# Altium PCB Copy of PicoROM.PcbDoc
Units mm, origin at the board's own origin, x right, y up, seen from the top; angles counter-clockwise.
Board outline 42.2 x 17.8 mm, 4 copper layers (F.Cu, In1.Cu, In4.Cu, B.Cu), stack 0.97 mm thick; 70 components, 124 nets, 450 pads, 11 vias.
Unrouted connection lines stored in the file: 77.
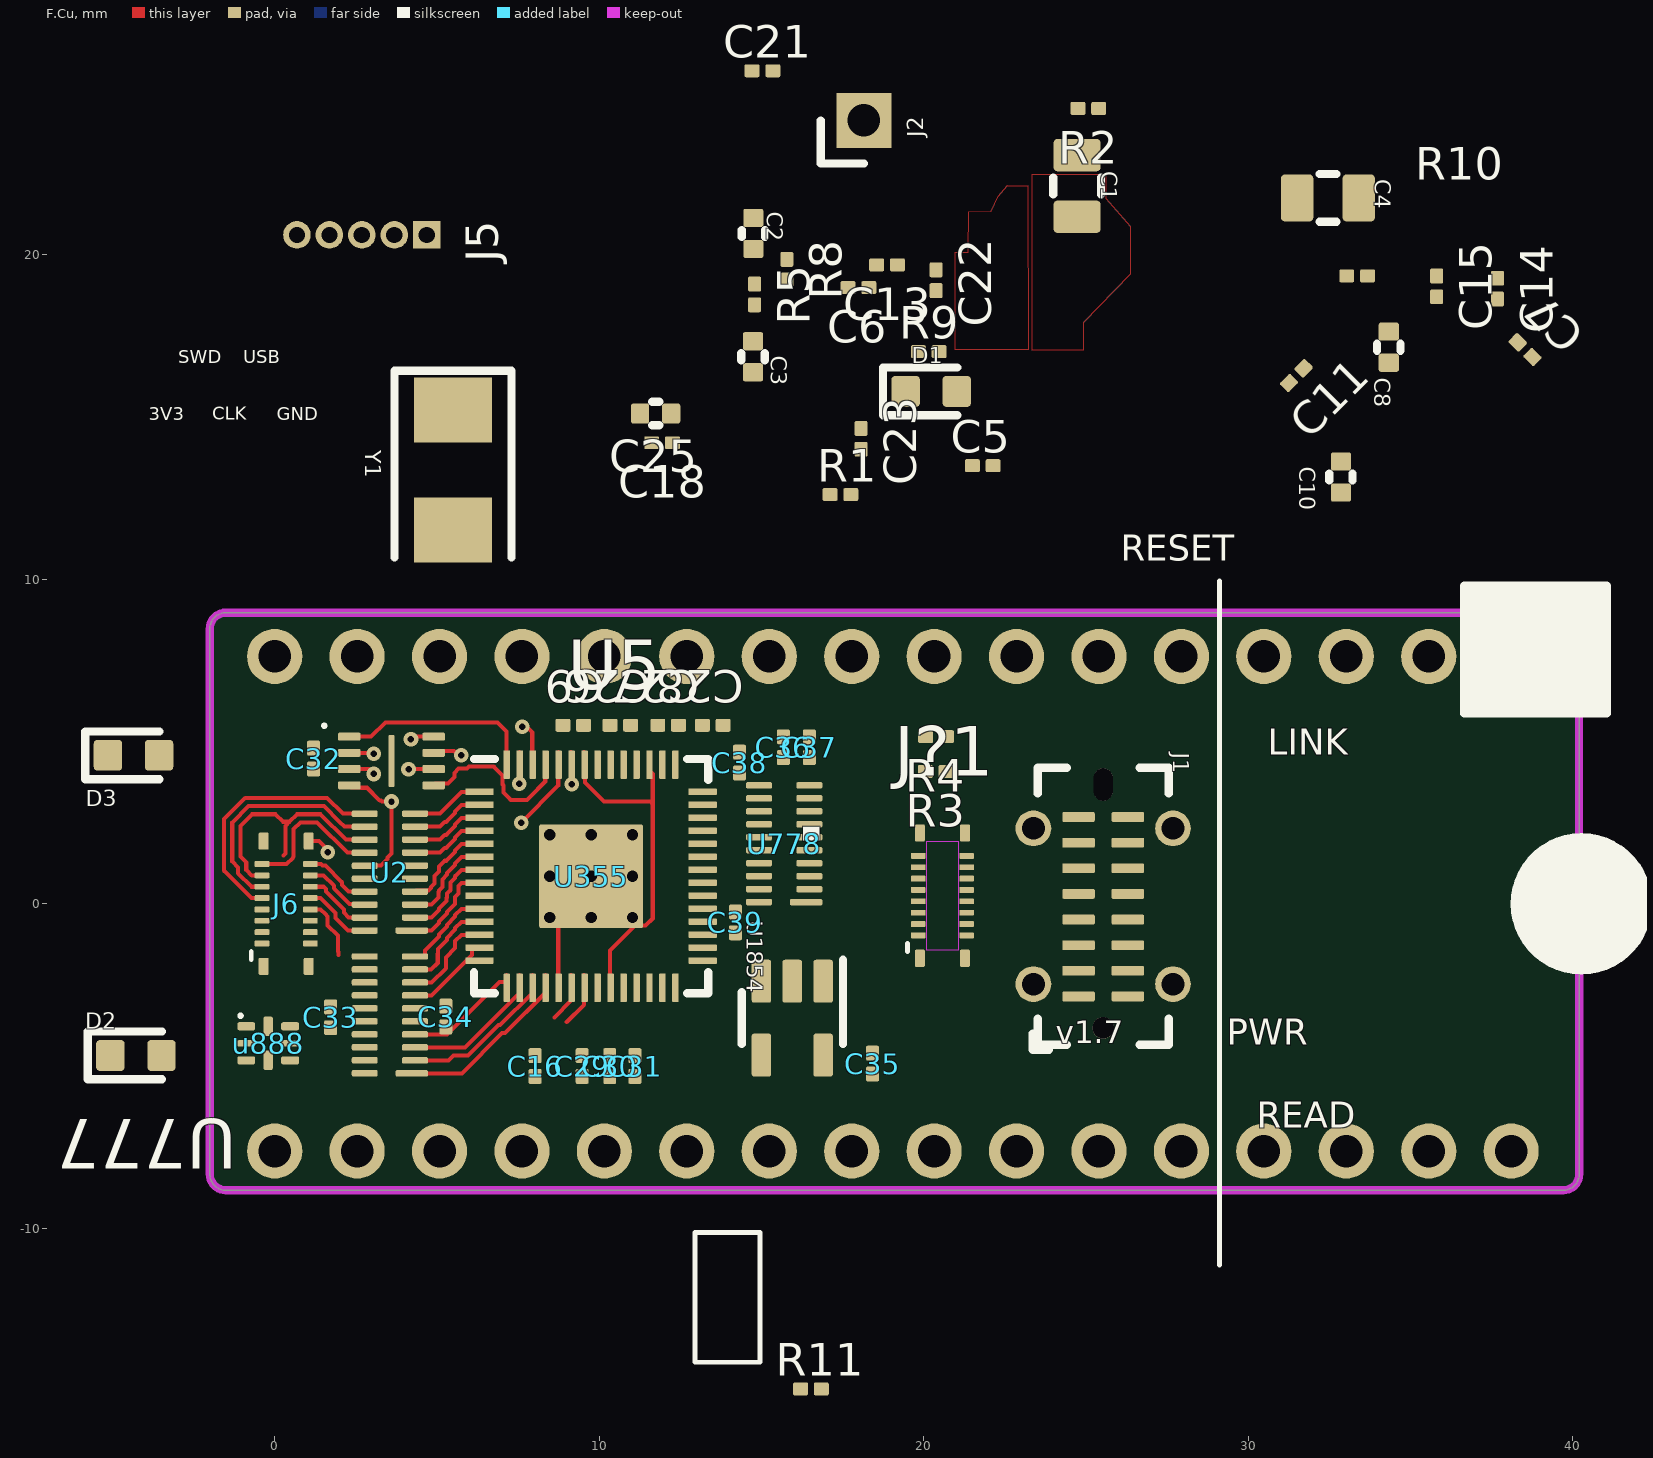
[diagram p0: F.Cu view]
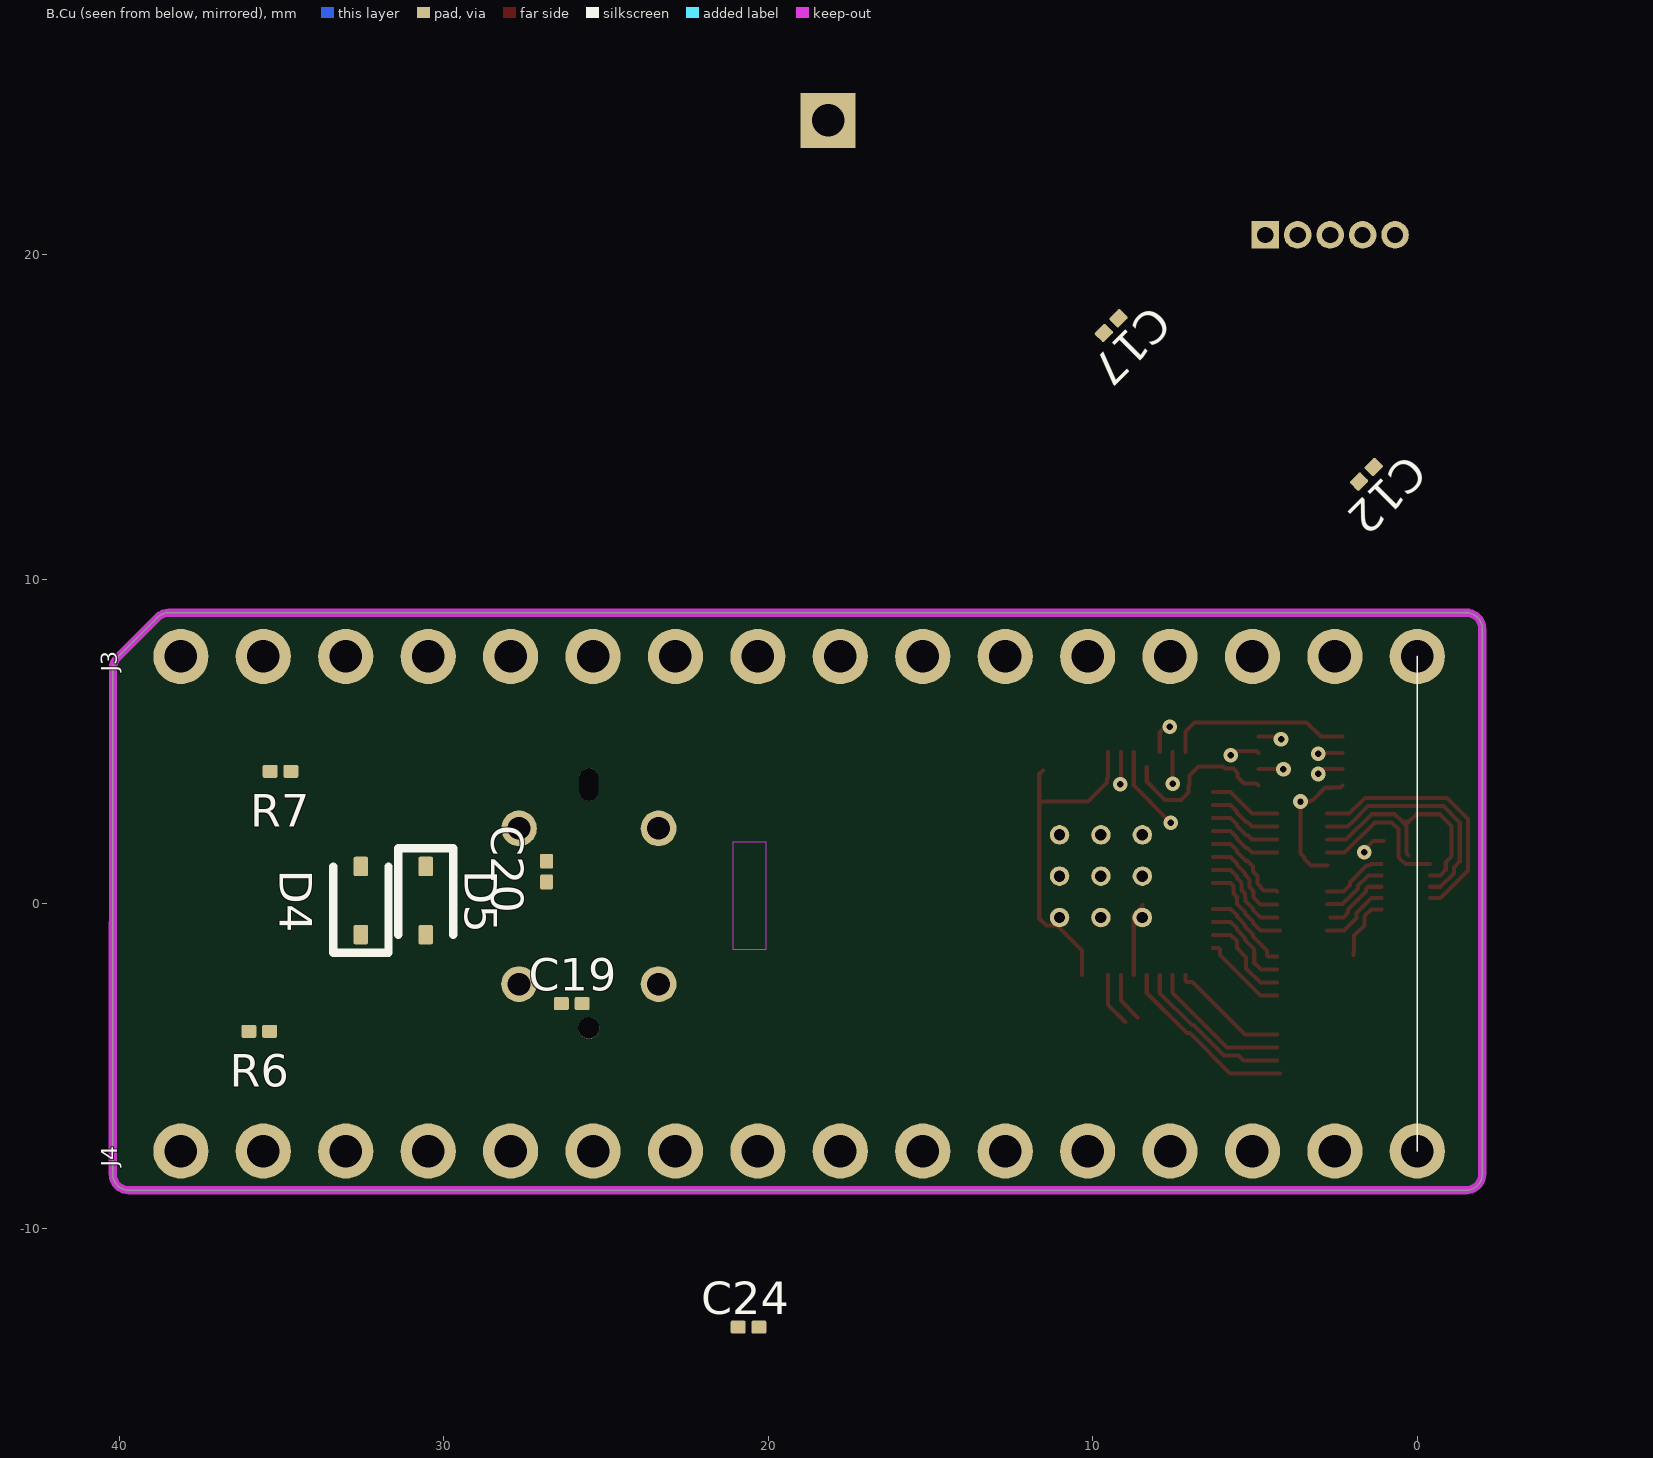
[diagram p1: B.Cu view, seen from below]
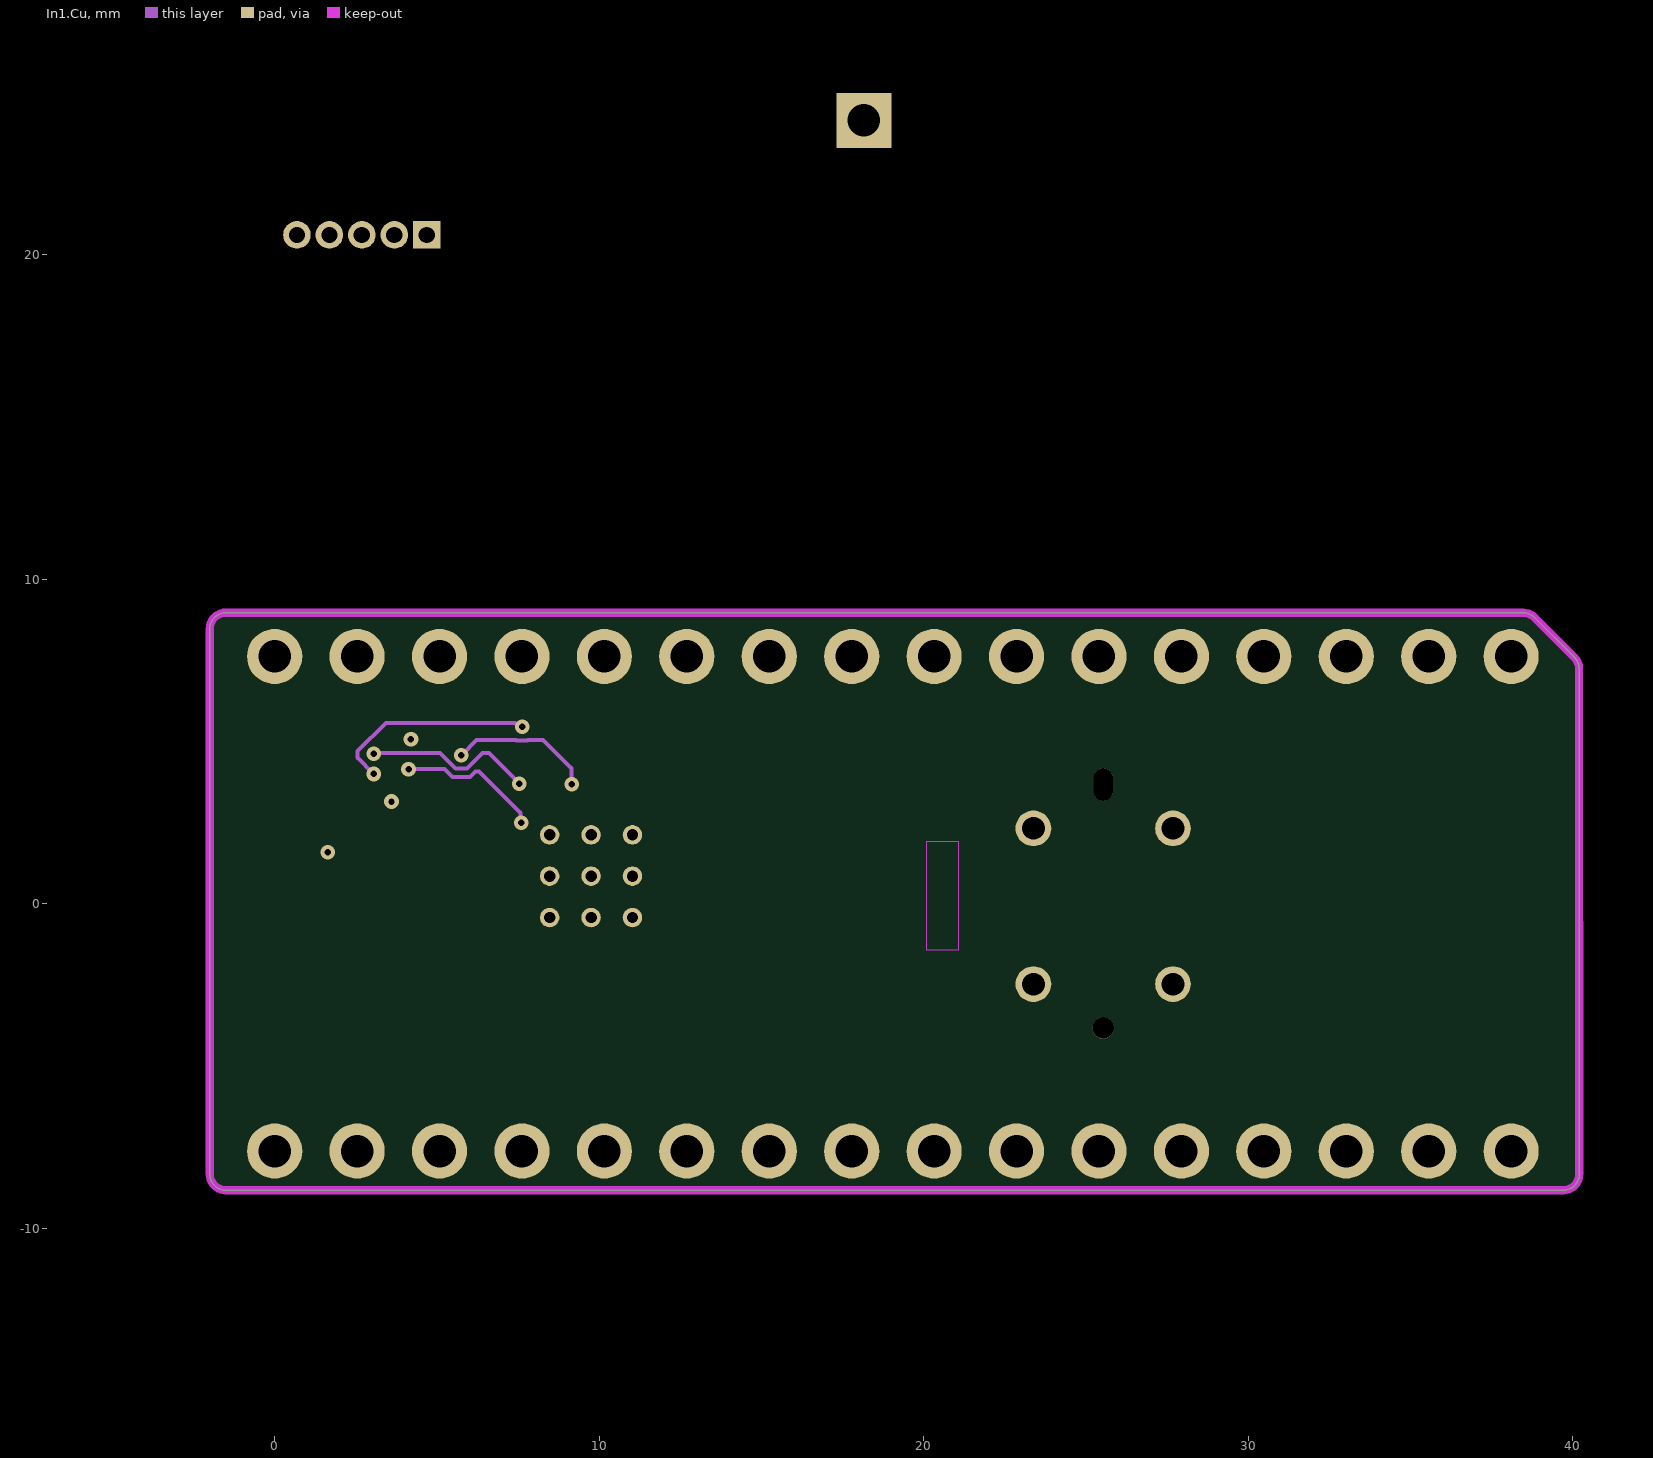
[diagram p2: In1.Cu]

## Layer stack, top to bottom
F.Mask: solder mask 0.0102, Solder Resist, Dk 3.5
F.Cu: signal copper 0.035
Dielectric 1: dielectric 0.16, FR-4, Dk 4.8
In1.Cu: signal copper 0.035
Dielectric3: dielectric 0.51, FR-4, Dk 4.8
In4.Cu: signal copper 0.035
Dielectric5: dielectric 0.16, FR-4, Dk 4.8
B.Cu: signal copper 0.035
B.Mask: solder mask 0.0102, Solder Resist, Dk 3.5

## Board outline
-1.5,8.97 38.468,8.969 cw(c38.468,8.469) 38.821,8.822 40.049,7.595 cw(c39.695,7.242) 40.2,-8.33 cw(c39.7,-8.33) 39.7,-8.83 -1.5,-8.83 cw(c-1.5,-8.33) -2,-8.33 -2,8.47 cw(c-1.5,8.47) -1.5,8.97

## Design rules (kind name [scope] priority, off if disabled: settings)
Clearance [All] p1: gap=0.125 ignorepadtopadclearanceinfootprint=FALSE
MinimumSolderMaskSliver [All] p1: minsoldermaskwidth=0
PolygonConnect Polygon_In2.Cu-+3V3_ConnectDirect [IsNamedPolygon('In2.Cu-+3V3') vs IsVia] p1: connectstyle=Direct reliefconductorwidth=0.254 reliefentries=4 polygonreliefangle="90 Angle" airgapwidth=0.254
PolygonConnect Polygon_In2.Cu-+3V3_ConnectRelief45 [IsNamedPolygon('In2.Cu-+3V3') vs (IsThruPin or IsSMTPin) and (PadShape_AllLayers = 'Round')] p2: connectstyle=Relief reliefconductorwidth=0.5 reliefentries=4 polygonreliefangle="45 Angle" airgapwidth=0.5
PolygonConnect Polygon_In2.Cu-+3V3_ConnectRelief90 [IsNamedPolygon('In2.Cu-+3V3') vs (IsThruPin or IsSMTPin) and (PadShape_AllLayers <> 'Round')] p3: connectstyle=Relief reliefconductorwidth=0.5 reliefentries=4 polygonreliefangle="90 Angle" airgapwidth=0.5
PolygonConnect Polygon_In4.Cu-GND_ConnectDirect [IsNamedPolygon('In4.Cu-GND') vs IsVia] p4: connectstyle=Direct reliefconductorwidth=0.254 reliefentries=4 polygonreliefangle="90 Angle" airgapwidth=0.254
PolygonConnect Polygon_In4.Cu-GND_ConnectRelief45 [IsNamedPolygon('In4.Cu-GND') vs (IsThruPin or IsSMTPin) and (PadShape_AllLayers = 'Round')] p5: connectstyle=Relief reliefconductorwidth=0.508 reliefentries=4 polygonreliefangle="45 Angle" airgapwidth=0.508
PolygonConnect Polygon_In4.Cu-GND_ConnectRelief90 [IsNamedPolygon('In4.Cu-GND') vs (IsThruPin or IsSMTPin) and (PadShape_AllLayers <> 'Round')] p6: connectstyle=Relief reliefconductorwidth=0.508 reliefentries=4 polygonreliefangle="90 Angle" airgapwidth=0.508
PolygonConnect Polygon_In1.Cu-GND_ConnectDirect [IsNamedPolygon('In1.Cu-GND') vs IsVia] p7: connectstyle=Direct reliefconductorwidth=0.254 reliefentries=4 polygonreliefangle="90 Angle" airgapwidth=0.254
PolygonConnect Polygon_In1.Cu-GND_ConnectRelief45 [IsNamedPolygon('In1.Cu-GND') vs (IsThruPin or IsSMTPin) and (PadShape_AllLayers = 'Round')] p8: connectstyle=Relief reliefconductorwidth=0.508 reliefentries=4 polygonreliefangle="45 Angle" airgapwidth=0.508
PolygonConnect Polygon_In1.Cu-GND_ConnectRelief90 [IsNamedPolygon('In1.Cu-GND') vs (IsThruPin or IsSMTPin) and (PadShape_AllLayers <> 'Round')] p9: connectstyle=Relief reliefconductorwidth=0.508 reliefentries=4 polygonreliefangle="90 Angle" airgapwidth=0.508
PolygonConnect Polygon_F.Cu-+3V3_ConnectDirect [IsNamedPolygon('F.Cu-+3V3')] p10: connectstyle=Direct reliefconductorwidth=0.254 reliefentries=4 polygonreliefangle="90 Angle" airgapwidth=0.254
PolygonConnect Polygon_F.Cu-GND_ConnectDirect [IsNamedPolygon('F.Cu-GND')] p11: connectstyle=Direct reliefconductorwidth=0.254 reliefentries=4 polygonreliefangle="90 Angle" airgapwidth=0.254
RoutingVias [All] p1: holewidth=0.25 width=0.45 viastyle="Through Hole" minholewidth=0.2 minwidth=0.45 maxholewidth=0.4 maxwidth=0.8
SilkToSilkClearance [All] p1: silktosilkclearance=0
SilkToSolderMaskClearance [IsPad] p1: minsilkscreentomaskgap=0 clearancetoexposedcopper=TRUE
SolderMaskExpansion [All] p1: expansion=0.102 istentingtop=FALSE
SupplyNets "Schematic Supply Nets_3" [InNet('P1V1')] p1: voltage=0.000
SupplyNets "Schematic Supply Nets_2" [InNet('GND')] p2: voltage=0.000
SupplyNets "Schematic Supply Nets_1" [InNet('P3V3')] p3: voltage=0.000
SupplyNets "Schematic Supply Nets" [InNet('P5V')] p4: voltage=0.000
Width [All] p1: maxlimit=5 minlimit=0.125 preferedwidth=0.125
27 further rules are at their usual default settings.

## Components (designator, comment, footprint, x,y, rotation, side; value= is the part's Value field where it differs from the comment)
C1 "1u" C_0805_2012Metric 24.726,22.119 r270 top
C2 "27p" C_0402_1005Metric 14.749,20.656 r90 top
C3 "27p" C_0402_1005Metric 14.739,16.856 r270 top
C4 "1u" C_0805_2012Metric 32.455,21.749 r0 top
C5 "Comment" C_0201_0603Metric#1 21.818,13.498 r0 top value=100n
C6 "100n" C_0201_0603Metric#1 17.989,18.986 r180 top
C7 "100n" C_0201_0603Metric#1 38.53,17.074 r315 top
C8 "1u" C_0402_1005Metric 34.33,17.149 r270 top
C9 "100n" C_0201_0603Metric#1 9.2,5.5 r0 top
C10 "1u" C_0402_1005Metric 32.855,13.149 r270 top
C11 "100n" C_0201_0603Metric#1 31.48,16.274 r225 top
C12 "100n" C_0201_0603Metric#2 1.569,13.234 r135 bottom
C13 "100n" C_0201_0603Metric#1 18.869,19.686 r180 top
C14 "100n" C_0201_0603Metric#1 37.68,18.954 r270 top
C15 "100n" C_0201_0603Metric#1 35.805,19.024 r270 top
C16 "100n" C_0201_0603Metric#3 8.025,-5 r270 top
C17 "100n" C_0201_0603Metric#2 9.433,17.816 r135 bottom
C18 "100n" C_0201_0603Metric#1 11.939,14.206 r180 top
C19 "Comment" C_0201_0603Metric#2 26.055,-3.076 r0 bottom value=100n
C20 "Comment" C_0201_0603Metric#2 26.832,0.991 r270 bottom value=100n
C21 "Comment" C_0201_0603Metric#1 15.031,25.668 r0 top value=100n
C22 "Comment" C_0201_0603Metric#1 20.381,19.213 r270 top value=100n
C23 "100n" C_0201_0603Metric#1 18.069,14.326 r270 top
C24 "Comment" C_0201_0603Metric#2 20.609,-13.045 r0 bottom value=100n
C25 "1u" C_0402_1005Metric 11.739,15.106 r180 top
C26 "100n" C_0201_0603Metric#1 10.65,5.5 r0 top
C27 "100n" C_0201_0603Metric#1 12.125,5.5 r0 top
C28 "100n" C_0201_0603Metric#1 13.5,5.5 r0 top
C29 "100n" C_0201_0603Metric#3 9.475,-5 r270 top
C30 "100n" C_0201_0603Metric#3 10.325,-5 r270 top
C31 "100n" C_0201_0603Metric#3 11.1,-5 r270 top
C32 "100n" C_0201_0603Metric#3 1.2,4.475 r270 top
C33 "100n" C_0201_0603Metric#3 1.725,-3.5 r270 top
C34 "100n" C_0201_0603Metric#3 5.275,-3.475 r270 top
C35 "100n" C_0201_0603Metric#3 18.425,-4.925 r270 top
C36 "100n" C_0201_0603Metric#3 15.675,4.825 r270 top
C37 "100n" C_0201_0603Metric#3 16.475,4.825 r270 top
C38 "100n" C_0201_0603Metric#3 14.325,4.35 r270 top
C39 "100n" C_0201_0603Metric#3 14.2,-0.575 r270 top
D1 "LED" LED_0603_1608Metric 20.231,15.788 r0 top
D2 "LED" LED_0603_1608Metric -4.275,-4.675 r0 top
D3 "LED" LED_0603_1608Metric -4.35,4.575 r0 top
D4 "NSR0320MW2T1G" D_SOD-323 32.555,0.099 r270 bottom
D5 "NSR0320MW2T1G" D_SOD-323 30.555,0.099 r90 bottom
J1 "USB_C_Receptacle_USB2.0" USB_C_Receptacle_G-Switch_GT-USB-7051x 25.53,-0.076 r90 top
J2 "External Reset" PinHeader_1x01_P2.54mm_Vertical 18.156,24.138 r90 top
J3 "Conn_01x16" PinHeader_1x16_P2.54mm_Vertical 38.1,7.62 r270 bottom
J4 "Conn_01x16" PinHeader_1x16_P2.54mm_Vertical 38.1,-7.62 r270 bottom
J5 "Conn_01x05_Pin" PinHeader_1x05_P1.00mm_Vertical 4.686,20.61 r270 top
J6 "CONN-HIROSE-BM28B0.6-16DS-2-0.35V" CONN-HIROSE-BM28B0.6-16DS-2-0.35V#1 0.355,0 r90 top
J?1 "CONN-HIROSE-BM28B0.6-16DS-2-0.35V" CONN-HIROSE-BM28B0.6-16DS-2-0.35V#2 20.575,0.25 r90 top
R1 "1k" R_0201_0603Metric#1 17.434,12.609 r0 top
R2 "1k" R_0201_0603Metric#1 25.071,24.508 r180 top
R3 "27" R_0201_0603Metric#1 20.37,4.075 r180 top
R4 "27" R_0201_0603Metric#1 20.38,5.15 r180 top
R5 "1k" R_0201_0603Metric#1 14.789,18.776 r270 top
R6 "5.1k" R_0201_0603Metric#2 35.685,-3.931 r180 bottom
R7 "5.1k" R_0201_0603Metric#2 35.03,4.08 r180 bottom
R8 "1k" R_0201_0603Metric#1 15.781,19.538 r270 top
R9 "1k" R_0201_0603Metric#1 20.156,17.013 r0 top
R10 "1k" R_0201_0603Metric#1 33.355,19.349 r180 top
R11 "100k" R_0201_0603Metric#1 16.525,-14.95 r0 top
U2 "IC-TI-TXB0108-DQS" SON40P200X55-20N 3.55,0.975 r180 top
U5 "IC-WINBOND-W25Q128JVS" SON50P300X60_HS-9N 3.6,4.4 r0 top
U355 "RP2040" RP2040-QFN-56 9.75,0.85 r0 top
U777 "IC-TI-TXB0108-DQS" SON40P200X55-20N 3.55,-3.425 r180 top
U778 "IC-TI-TXB0108-DQS" SON40P200X55-20N 15.7,1.85 r180 top (schematic designator U777)
u888 "Comment" PQFN50P150X150X40-8N -0.2,-4.3 r0 top
U1854 "AP2112K-3.3" SOT-23-5 15.95,-3.525 r270 top
Y1 "445C25D12M00000" Crystal_SMD_5032-2Pin_5.0x3.2mm 5.496,13.371 r270 top

## Footprints (in the part's own frame and the unit in brackets; to place one, negate y for a bottom-side part, rotate by r counter-clockwise, add the part's x,y. Pads: shape width x height; smd on the part's side, far side on the other; paste and mask are expansions set on the pad)
C_0201_0603Metric#1 [mm]
  rrect25% 0.46x0.4 smd paste-0.46 mask+0.051: 1(-0.32,0) 2(0.32,0)
  rrect25% 0.318x0.36 on Top Paste mask-0.36: Un1(-0.345,0) Un2(0.345,0)
C_0201_0603Metric#2 [mm]
  rrect25% 0.46x0.4 smd paste-0.46 mask+0.051: 1(0.32,0) 2(-0.32,0)
  rrect25% 0.318x0.36 on Bottom Paste mask-0.36: Un1(0.345,0) Un2(-0.345,0)
C_0201_0603Metric#3 [mm]
  rrect25% 0.46x0.4 smd paste-0.46 mask+0.051: 1(0.32,0) 2(-0.32,0)
  rrect25% 0.318x0.36 on Top Paste mask-0.36: Un1(0.345,0) Un2(-0.345,0)
C_0402_1005Metric [mm]
  rrect25% 0.56x0.62 smd mask+0.051: 1(-0.48,0) 2(0.48,0)
  silkscreen extent -0.11,-0.36 0.11,0.36
C_0805_2012Metric [mm]
  rrect25% 1x1.45 smd mask+0.051: 1(-0.95,0) 2(0.95,0)
  silkscreen extent -0.26,-0.73 0.26,0.73
CONN-HIROSE-BM28B0.6-16DS-2-0.35V#1 [mm]
  rrect30% 0.18x0.45 smd mask+0.05: 1(-1.225,0.745) 2(-1.225,-0.745) 3(-0.875,0.745) 4(-0.875,-0.745) 5(-0.525,0.745) 6(-0.525,-0.745) 7(-0.175,0.745) 8(-0.175,-0.745) 9(0.175,0.745) 10(0.175,-0.745) 11(0.525,0.745) 12(0.525,-0.745) 13(0.875,0.745) 14(0.875,-0.745) 15(1.225,0.745) 16(1.225,-0.745)
  rrect30% 0.53x0.31 smd mask+0.05: 17(-1.93,0.694) 18(-1.93,-0.694) 19(1.93,0.694) 20(1.93,-0.694)
  silkscreen extent -1.73,1.07 -1.48,1.07, body extent -2.7,-0.85 2.7,0.85, height 0.65
CONN-HIROSE-BM28B0.6-16DS-2-0.35V#2 [mm]
  rrect30% 0.18x0.45 smd mask+0.05: 1(-1.225,0.745) 2(-1.225,-0.745) 3(-0.875,0.745) 4(-0.875,-0.745) 5(-0.525,0.745) 6(-0.525,-0.745) 7(-0.175,0.745) 8(-0.175,-0.745) 9(0.175,0.745) 10(0.175,-0.745) 11(0.525,0.745) 12(0.525,-0.745) 13(0.875,0.745) 14(0.875,-0.745) 15(1.225,0.745) 16(1.225,-0.745)
  rrect30% 0.53x0.31 smd mask+0.05: 17(-1.93,0.694) 18(-1.93,-0.694) 19(1.93,0.694) 20(1.93,-0.694)
  Edge.Cuts region: -1.66,-0.5 1.66,-0.5 1.66,0.5 -1.66,0.5
  silkscreen extent -1.73,1.07 -1.48,1.07, body extent -2.7,-0.85 2.7,0.85, height 0.65
Crystal_SMD_5032-2Pin_5.0x3.2mm [mm]
  rect 2x2.4 smd mask+0.051: 1(-1.85,0) 2(1.85,0)
  silkscreen extent -3.05,-1.8 2.7,1.8
D_SOD-323 [mm]
  rrect25% 0.6x0.45 smd mask+0.051: 1(1.05,0) 2(-1.05,0)
  silkscreen extent -1.05,-0.85 1.61,0.85
LED_0603_1608Metric [mm]
  rrect25% 0.875x0.95 smd mask+0.051: 1(-0.787,0) 2(0.787,0)
  silkscreen extent -1.49,-0.73 0.8,0.73
PinHeader_1x01_P2.54mm_Vertical [mm]
  rect 1.7x1.7 hole 1 paste-2539.97 mask+0.051: 1(0,0)
  silkscreen extent -1.33,0 0,1.33
PinHeader_1x05_P1.00mm_Vertical [mm]
  rect 0.85x0.85 hole 0.5 paste-2539.97 mask+0.051: 1(0,0)
  rrect100% 0.85x0.85 hole 0.5 paste-2539.97 mask+0.051: 2(0,-1) 3(0,-2) 4(0,-3) 5(0,-4)
PinHeader_1x16_P2.54mm_Vertical [mm]
  round 1.7 hole 1 paste-2539.97 mask+0.051: 1(0,0)
  rrect100% 1.7x1.7 hole 1 paste-2539.97 mask+0.051: 2(0,2.54) 3(0,5.08) 4(0,7.62) 5(0,10.16) 6(0,12.7) 7(0,15.24) 8(0,17.78) 9(0,20.32) 10(0,22.86) 11(0,25.4) 12(0,27.94) 13(0,30.48) 14(0,33.02) 15(0,35.56) 16(0,38.1)
PQFN50P150X150X40-8N [mm] "PQFN, 8-Leads, Body 1.50x1.50mm, Pitch 0.50mm, IPC Medium Density"
  rrect50% 0.55x0.25 smd mask+0.05: 1(-0.675,0.525) 3(-0.675,-0.525) 5(0.675,-0.525) 7(0.675,0.525)
  rrect50% 0.55x0.2 smd mask+0.05: 2(-0.675,0) 6(0.675,0)
  rrect50% 0.3x0.6 smd mask+0.05: 4(0,-0.525) 8(0,0.525)
  silkscreen extent -0.9,0.8 -0.8,0.9, body extent -0.75,-0.75 0.75,0.75, height 0.4
R_0201_0603Metric#1 [mm]
  rrect25% 0.46x0.4 smd paste-0.46 mask+0.051: 1(-0.32,0) 2(0.32,0)
  rrect25% 0.318x0.36 on Top Paste mask-0.36: Un1(-0.345,0) Un2(0.345,0)
R_0201_0603Metric#2 [mm]
  rrect25% 0.46x0.4 smd paste-0.46 mask+0.051: 1(0.32,0) 2(-0.32,0)
  rrect25% 0.318x0.36 on Bottom Paste mask-0.36: Un1(0.345,0) Un2(-0.345,0)
RP2040-QFN-56 [mm]
  rrect25% 0.875x0.2 smd mask+0.051: 1(-3.437,2.6) 2(-3.438,2.2) 3(-3.437,1.8) 4(-3.438,1.4) 5(-3.437,1) 6(-3.438,0.6) 7(-3.438,0.2) 8(-3.437,-0.2) 9(-3.437,-0.6) 10(-3.438,-1) 11(-3.437,-1.4) 12(-3.437,-1.8) 13(-3.438,-2.2) 14(-3.437,-2.6) 29(3.438,-2.6) 30(3.437,-2.2) 31(3.437,-1.8) 32(3.438,-1.4) 33(3.437,-1) 34(3.438,-0.6) 35(3.438,-0.2) 36(3.438,0.2) 37(3.438,0.6) 38(3.438,1) 39(3.437,1.4) 40(3.437,1.8) 41(3.438,2.2) 42(3.438,2.6)
  rrect25% 0.2x0.875 smd mask+0.051: 15(-2.6,-3.438) 16(-2.2,-3.438) 17(-1.8,-3.437) 18(-1.4,-3.437) 19(-1,-3.438) 20(-0.6,-3.437) 21(-0.2,-3.438) 22(0.2,-3.438) 23(0.6,-3.438) 24(1,-3.438) 25(1.4,-3.438) 26(1.8,-3.437) 27(2.2,-3.438) 28(2.6,-3.438) 43(2.6,3.438) 44(2.2,3.437) 45(1.8,3.437) 46(1.4,3.437) 47(1,3.438) 48(0.6,3.437) 49(0.2,3.438) 50(-0.2,3.438) 51(-0.6,3.437) 52(-1,3.438) 53(-1.4,3.437) 54(-1.8,3.437) 55(-2.2,3.437) 56(-2.6,3.437)
  round 0.6 hole 0.35 paste-2539.97 mask-0.6: 57(-1.275,1.275) 57(-1.275,-1.275) 57(-1.275,0) 57(0,0) 57(0,1.275) 57(0,-1.275) 57(1.275,1.275) 57(1.275,-1.275) 57(1.275,0)
  rrect4% 3.2x3.2 smd mask+0.051: 57(0,0)
  rrect23% 1.084x1.084 on Top Paste mask-1.084: Un1(-0.638,0.637) Un2(-0.637,-0.638) Un3(0.637,0.637) Un4(0.637,-0.638)
  silkscreen extent -3.61,-3.61 3.61,3.61
SON40P200X55-20N [mm] "SON, 20-Leads, Body 4.00x2.00mm, Pitch 0.40mm, IPC Medium Density"
  rrect50% 1x0.2 smd mask+0.05: 1(-0.675,1.8)
  rrect50% 0.8x0.2 smd mask+0.05: 2(-0.775,1.4) 3(-0.775,1) 4(-0.775,0.6) 5(-0.775,0.2) 6(-0.775,-0.2) 7(-0.775,-0.6) 8(-0.775,-1) 9(-0.775,-1.4) 10(-0.775,-1.8) 11(0.775,-1.8) 12(0.775,-1.4) 13(0.775,-1) 14(0.775,-0.6) 15(0.775,-0.2) 16(0.775,0.2) 17(0.775,0.6) 18(0.775,1) 19(0.775,1.4) 20(0.775,1.8)
  body extent -1.05,-2 1.05,2, height 0.55
SON50P300X60_HS-9N [mm] "SON, 8-Leads, Body 2.00x3.00mm, Pitch 0.50mm, Thermal Pad 1.60x0.20mm, IPC Medium Density"
  rrect40% 0.7x0.25 smd mask+0.05: 1(-1.3,0.75) 2(-1.3,0.25) 3(-1.3,-0.25) 4(-1.3,-0.75) 5(1.3,-0.75) 6(1.3,-0.25) 7(1.3,0.25) 8(1.3,0.75)
  rrect50% 0.2x1.6 smd mask+0.05: 9(0,0)
  silkscreen extent -2.12,1.04 -2.02,1.14, body extent -1.55,-1 1.55,1, height 0.6
SOT-23-5 [mm]
  rrect25% 1.325x0.6 smd mask+0.051: 1(-1.138,0.95) 2(-1.138,0) 3(-1.138,-0.95) 4(1.138,-0.95) 5(1.138,0.95)
  silkscreen extent -1.8,-1.56 0.8,1.56
USB_C_Receptacle_G-Switch_GT-USB-7051x [mm]
  rrect25% 0.3x1 smd mask+0.051: A1(-2.78,0.76) A4(-1.99,0.76) A5(-1.2,0.76) A6(-0.41,0.76) A7(0.38,0.76) A8(1.17,0.76) A9(1.96,0.76) A12(2.75,0.76) B1(2.75,-0.76) B4(1.96,-0.76) B5(1.17,-0.76) B6(0.38,-0.76) B7(-0.41,-0.76) B8(-1.2,-0.76) B9(-1.99,-0.76) B12(-2.78,-0.76)
  round 1.1 hole 0.7 mask+0.051: S1(-2.4,-2.15) S1(-2.4,2.15) S1(2.4,-2.15) S1(2.4,2.15)
  round 0.66 hole 0.66 paste-2539.97 mask+0.051: Un1(-3.75,0)
  rrect100% 1x0.58 hole 0.58 slot 1 at 0 deg paste-2539.97 mask+0.051: Un2(3.75,0)
  silkscreen extent -4.42,-2.02 4.27,2.17

## Part data
C1 C4: library part C, MPN=C28323
C2 C3: library part C, MPN=C1557
C5 C19 C20 C21 C22 C24: library part C_0201_0603Metric, "Capacitor SMD 0201 (0603 Metric), square (rectangular) end terminal, IPC_7351 nominal, (Body size source: https://www.vishay.com/docs/20052/crcw0201e3.pdf), generated with kicad-footprint-generator", MPN=C1525, Footprint=Capacitor_SMD:C_0201_0603Metric, ki_fp_filters=C_*
C6 C7 C9 C11 C12 C13 C14 C15 C16 C17 C18 C23 C26 C27 C28 C29 C30 C31 C32 C33 C34 C35 C36 C37 C38 C39: library part C, MPN=C1525
C8 C10 C25: library part C, MPN=C52923
D1: MPN=C510027
D2: MPN=C2922668
D3: MPN=C2925173
D4 D5: library part D_Schottky, MPN=C48192
J1: MPN=C2843970
J2: library part Conn_01x01_Pin
J6 J?1: library part CMP-002-00338-6, "CONN,2X8,SMD,GOLD BM28B0.6-16DS-2-0.35V", Max Current Rating=300mA, Max Operating Temperature=85°C, Min Operating Temperature=-55°C, Connector Type="BOARD STACKING CONNECTOR", Mounting Technology=SMT, Pins=16, RoHS Compliant=Yes
R1 R2 R5 R8 R9 R10: library part R, MPN=C270335
R3 R4: library part R, MPN=C273268
R6 R7: library part R, MPN=C473460
R11: library part R, MPN=C270364
U355: MPN=C2040
U1854: MPN=C51118
Y1: library part Crystal, MPN=C148313

## Via types
v1: diameter 0.45, hole 0.2, F.Cu to B.Cu, tented both sides, 11 vias

## Nets (pads, with @x,y where several pads share a name; then routed paths per layer and width w, separated by ;. In a path a pad name is that pad's centre, name@x,y a point inside that pad or via, vN(x,y) a via of type N, cw(c..) or ccw(c..) an arc to the next point about the centre after c; other vN are vias at no path point)
A0: U2.10 U355.2 | length 2.2
  F.Cu w0.125: U2.10 5.09,2.775 5.753,3.437 6.3,3.437
A1: U2.9 U355.3 | length 2.3
  F.Cu w0.125: U2.9 5.09,2.375 5.24,2.525 5.287,2.525 5.563,2.801 5.563,2.847 5.753,3.037 6.3,3.037
A2: U2.8 U355.4 | length 2.3
  F.Cu w0.125: U2.8 5.09,1.975 5.24,2.125 5.287,2.125 5.562,2.401 5.562,2.447 5.753,2.637 6.3,2.637
A3: U2.7 U355.5 | length 2.3
  F.Cu w0.125: U2.7 5.09,1.575 5.24,1.725 5.287,1.725 5.562,2.001 5.562,2.047 5.753,2.237 6.3,2.237
A4: U2.4 U355.6 | length 2.8
  F.Cu w0.125: U2.4 4.362,0.412 4.739,0.412 4.812,0.486 4.812,0.518 4.919,0.624 4.919,0.856 5.062,1 5.062,1.147 5.24,1.325 5.287,1.325 5.563,1.601 5.563,1.647 5.753,1.837 6.3,1.837
A5: U2.3 U355.7 | length 2.9
  F.Cu w0.125: U2.3 4.83,-0.025 5.05,0.195 5.05,0.37 5.062,0.382 5.062,0.414 5.169,0.52 5.169,0.753 5.312,0.896 5.312,0.951 5.562,1.201 5.562,1.247 5.753,1.437 6.3,1.437
A6: U2.2 U355.8 | length 2.9
  F.Cu w0.125: U2.2 4.83,-0.425 5.062,-0.192 5.062,-0.146 5.3,0.092 5.3,0.185 5.312,0.197 5.312,0.311 5.419,0.417 5.419,0.649 5.562,0.793 5.562,0.847 5.753,1.038 6.3,1.038
A7: U2.1 U355.9 | length 3
  F.Cu w0.125: U2.1 4.83,-0.825 5.062,-0.592 5.062,-0.546 5.312,-0.296 5.312,-0.249 5.55,-0.012 5.55,0.081 5.563,0.094 5.563,0.207 5.669,0.313 5.669,0.545 5.761,0.638 6.3,0.638
A8: U355.11 U777.10 | length 2.8
  F.Cu w0.125: U777.10 4.593,-1.625 4.63,-1.588 4.63,-1.445 4.769,-1.306 4.769,-1.303 5.062,-1.009 5.062,-0.946 5.312,-0.696 5.312,-0.649 5.563,-0.399 5.563,-0.353 5.753,-0.163 6.3,-0.163
A9: U355.12 U777.9 | length 2.9
  F.Cu w0.125: U777.9 4.82,-2.025 5.025,-1.82 5.025,-1.546 5.038,-1.534 5.038,-1.387 5.312,-1.113 5.312,-1.049 5.562,-0.799 5.562,-0.753 5.753,-0.563 6.3,-0.563
A10: U355.13 U777.8 | length 2.9
  F.Cu w0.125: U777.8 4.838,-2.425 5.275,-1.988 5.275,-1.65 5.562,-1.363 5.562,-1.153 5.753,-0.962 6.3,-0.962
A11: U355.14 U777.7 | length 2.7
  F.Cu w0.125: U777.7 4.838,-2.825 6.086,-1.577 6.086,-1.4 6.123,-1.363 6.3,-1.363
A12: C34.1 U355.15 U777.4 | length 3.7
  F.Cu w0.125: U777.4 5.313,-4.025 6.923,-2.414 7.1,-2.414 7.137,-2.377 U355.15@7.137,-2.2
A13: U355.16 U777.3 | length 4.5
  F.Cu w0.125: U777.3 5.86,-4.425 7.537,-2.747 U355.16@7.537,-2.2
A14: U355.17 U777.2 | length 5
  F.Cu w0.125: U777.2 5.359,-4.825 5.509,-4.675 5.963,-4.675 6.902,-3.736 6.949,-3.736 7.937,-2.747 U355.17@7.937,-2.2
A15: U355.18 U777.1 | length 5.7
  F.Cu w0.125: U777.1 5.767,-5.225 7.006,-3.986 7.099,-3.986 8.337,-2.747 U355.18@8.337,-2.2
A16: U355.27
A17: U355.28
D0: U355.34
D1: U355.35
D2: U355.36
D3: U355.37
D4: U355.38
D5: U355.39
D6: U355.40
D7: U355.41
EXT_RESET: J2.1 R8.1
EXT_RESET_EN: 
EXT_RESET_VALUE: 
GND: D1.1 D2.1 D3.1 J3.16 J6.19 J6.20 U2.15 U5.4 U355.19 U355.57 U777.15 | length 7.2
  F.Cu w0.125: J6.20 1.37,1.93 1.64,1.66 v1(1.64,1.59) ; U5.4 2.362,3.588 2.648,3.588 2.661,3.575 2.85,3.575 3.237,3.188 3.275,3.188 3.313,3.15 v1(3.6,3.15) 3.6,1.55 3.475,1.425 3.475,1.38 3.27,1.175 U2.15 ; U355.57@8.463,-0.038 8.463,-0.073 8.737,-0.348 U355.19@8.737,-2.2
INFO_LED1: J6.18 R10.2
INFO_LED2: J6.17 R2.2
IO_EXPAND: U355.29
IOA0: J6.9 U2.11 | length 7.9
  F.Cu w0.125: J6.9 -0.714,0.175 -1.557,1.018 -1.557,2.608 -0.907,3.258 1.617,3.258 2.1,2.775 U2.11
IOA1: J6.11 U2.12 | length 7.1
  F.Cu w0.125: J6.11 -0.71,0.525 -1.125,0.94 -1.125,1.118 -1.307,1.3 -1.307,2.504 -0.804,3.008 1.513,3.008 1.996,2.525 2,2.525 2.15,2.375 U2.12
IOA2: J6.13 U2.13 | length 7.6
  F.Cu w0.125: J6.13 -0.707,0.875 -0.875,1.043 -0.875,1.278 -1.057,1.459 -1.057,2.401 -0.7,2.758 0.022,2.758 0.251,2.528 0.459,2.528 ; 0.27,1.49 0.332,1.551 0.332,2.401 0.459,2.528 ; U2.13 2.192,1.975 1.41,2.758 0.688,2.758 0.459,2.528
IOA3: J6.15 U2.14 | length 4.6
  F.Cu w0.125: J6.15 0.37,1.225 0.562,1.418 0.562,1.429 0.582,1.448 0.582,2.297 0.792,2.508 1.306,2.508 2.239,1.575 U2.14
IOA4: J6.16 U2.17 | length 2.1
  F.Cu w0.125: J6.16 1.422,1.225 1.469,1.178 1.56,1.178 2.075,0.663 2.075,0.581 2.281,0.375 U2.17
IOA5: J6.14 U2.18 | length 2.1
  F.Cu w0.125: J6.14 1.505,0.875 1.825,0.555 1.825,0.478 2.308,-0.006 2.756,-0.006 U2.18
IOA6: J6.12 U2.19 | length 2.1
  F.Cu w0.125: J6.12 1.502,0.525 1.575,0.452 1.575,0.374 2.131,-0.182 2.131,-0.276 2.28,-0.425 U2.19@2.675,-0.425
IOA7: J6.10 U2.20 | length 2.2
  F.Cu w0.125: J6.10 1.417,0.175 1.517,0.075 1.52,0.075 1.881,-0.286 1.881,-0.444 2.262,-0.825 U2.20
IOA8: U777.11
IOA9: U777.12
IOA10: U777.13
IOA11: U777.14
IOA12: U777.17
IOA13: U777.18
IOA14: U777.19
IOA15: U777.20
Net#PWR01_1: J1.A1 J1.S1
Net#PWR04_1: C1.2
Net#PWR05_1: U1854.2
Net#PWR06_1: C2.2 C3.2
Net#PWR010_1: C4.2
Net#PWR012_1: C6.2 C7.2
Net#PWR013_1: C8.2
Net#PWR019_1: R6.1 R7.1
Net#PWR021_1: 
Net#PWR024_1: C18.2
Net#PWR026_1: R9.2
Net#PWR027_1: C18.1 C25.1
Net#PWR036_1: C23.1
Net#PWR037_1: C23.2
Net#PWR038_1: C25.2
Net#PWR039_1: J5.1
Net#PWR040_1: J5.5
NetC3_1: C3.1 R5.2 Y1.2
NetD1_2: D1.2 R9.1
NetD2_2: D2.2 R10.1
NetD3_2: D3.2 R2.1
NetD4_2: D4.2 J1.A4
NetJ1_A5: J1.A5 R6.2
NetJ1_B5: J1.B5 R7.2
NetR3_2: R3.2 U355.47
NetR4_2: R4.2 U355.46
NetR8_2: R8.2
P1V1: C6.1 C7.1 C8.1 U355.23 U355.45 U355.50 | length 10.4
  F.Cu w0.125: U355.50@9.538,4.675 9.538,3.884 9.562,3.859 9.562,3.738 10.15,3.15 11.575,3.15 11.65,3.075 ; U355.23@10.337,-2.2 10.337,-1.438 11.1,-0.675 11.429,-0.675 11.65,-0.454 11.65,3.075 ; U355.45@11.537,4.11 11.65,3.998 11.65,3.075
P3V3: C4.1 U2.5 U2.6 U5.8 U355.1 U355.10 U355.22 U355.33 U355.42 U355.43 U355.44 U355.48 U355.49 U777.5 U777.6 U1854.5 | length 0.7
  F.Cu w0.125: v1(4.2,5.069) 4.288,5.069 4.369,5.15 U5.8
P5V: C1.1 D4.1 D5.1 U2.16 U777.16 U1854.1 U1854.3
PIN_5V: D5.2 J4.1
PIN_A0: J3.12
PIN_A1: J3.11
PIN_A2: J3.10
PIN_A3: J3.9
PIN_A4: J3.8
PIN_A5: J3.7
PIN_A6: J3.6
PIN_A7: J3.5
PIN_A8: J4.6
PIN_A9: J4.7
PIN_A10: J4.10
PIN_A11: J4.8
PIN_A12: J3.4
PIN_A13: J4.5
PIN_A14: J4.4
PIN_A15: J3.3
PIN_A16: J3.2
PIN_A17: J4.3
PIN_D0: J3.13
PIN_D1: J3.14
PIN_D2: J3.15
PIN_D3: J4.16
PIN_D4: J4.15
PIN_D5: J4.14
PIN_D6: J4.13
PIN_D7: J4.12
QSPI_SCLK: U5.6 U355.52 | length 7.9
  F.Cu w0.125: v1(4.125,4.15) U5.6 ; v1(7.6,2.5) 8.737,3.637 U355.52@8.737,4.675
  In1.Cu w0.125: v1(4.125,4.15) 5.238,4.15 5.476,3.912 6.024,3.912 6.192,4.08 6.295,4.08 7.571,2.804 7.571,2.529 v1(7.6,2.5)
QSPI_SD0: U5.5 U355.53 | length 5.2
  F.Cu w0.125: U5.5 4.962,3.712 5.343,3.712 5.537,3.907 5.537,4.031 5.669,4.162 5.921,4.162 5.983,4.225 6.75,4.225 7.025,3.95 7.025,3.677 7.05,3.652 7.05,3.425 7.275,3.2 7.775,3.2 7.863,3.288 8.337,3.762 U355.53@8.337,4.219
QSPI_SD1: U5.2 U355.55 | length 7
  F.Cu w0.125: U5.2 3.025,4.65 v1(3.054,4.621) ; v1(7.537,3.7) U355.55@7.538,4.675
  In1.Cu w0.125: v1(3.054,4.621) 3.083,4.65 5.092,4.65 5.579,4.162 5.921,4.162 6.408,4.65 6.6,4.65 7.537,3.713 v1(7.537,3.7)
QSPI_SD2: U5.3 U355.54 | length 8.2
  F.Cu w0.125: U5.3 2.9,4.15 v1(3.05,4) ; v1(7.625,5.45) 7.687,5.388 7.832,5.388 7.937,5.283 U355.54@7.937,4.675
  In1.Cu w0.125: v1(3.05,4) 2.55,4.5 2.55,4.7 3.425,5.575 7.412,5.575 7.537,5.45 v1(7.625,5.45)
QSPI_SD3: U5.7 U355.51 | length 6.4
  F.Cu w0.125: U5.7 4.962,4.712 5.525,4.712 5.662,4.575 v1(5.75,4.575) ; U355.51@9.137,4.675 9.137,3.7 v1(9.15,3.688)
  In1.Cu w0.125: v1(5.75,4.575) 6.225,5.05 7.442,5.05 7.454,5.037 7.796,5.037 7.808,5.05 8.275,5.05 9.15,4.175 v1(9.15,3.688)
QSPI_SS: R1.1 U5.1 U355.56 | length 6
  F.Cu w0.125: U5.1 2.975,5.15 3.413,5.588 6.862,5.588 7.137,5.313 7.137,4.889 ; 7.137,4.889 7.137,4.675 7.137,4.889
SWCLK: J5.3 U355.24
SWD: J5.4 U355.25
USB_D+: J1.A6 J1.B6 R3.1
USB_D-: J1.A7 J1.B7 R4.1
XIN: C2.1 U355.20 Y1.1 | length 1.5
  F.Cu w0.125: 8.625,-3.5 9.137,-2.988 U355.20@9.137,-2.2
XOUT: R5.1 U355.21 | length 1.7
  F.Cu w0.125: 9,-3.65 9.537,-3.113 U355.21@9.537,-2.2
{\B\U\F\_\O\E\}\: U355.30
{\C\E\}\: U355.32
{\O\E\}\: U355.31
{\P\I\N\_\C\E\}\: J4.11 R11.1
{\P\I\N\_\O\E\}\: J4.9
{\U\S\B\_\B\O\O\T\}\: J5.2 R1.2
pads on no net: C5.1 C5.2 C5.Un1 C5.Un2 C6.Un1 C6.Un2 C7.Un1 C7.Un2 C9.1 C9.2 C9.Un1 C9.Un2 C10.1 C10.2 C11.1 C11.2 C11.Un1 C11.Un2 C12.1 C12.2 C12.Un1 C12.Un2 C13.1 C13.2 C13.Un1 C13.Un2 C14.1 C14.2 C14.Un1 C14.Un2 C15.1 C15.2 C15.Un1 C15.Un2 C16.1 C16.2 C16.Un1 C16.Un2 C17.1 C17.2 C17.Un1 C17.Un2 C18.Un1 C18.Un2 C19.1 C19.2 C19.Un1 C19.Un2 C20.1 C20.2 C20.Un1 C20.Un2 C21.1 C21.2 C21.Un1 C21.Un2 C22.1 C22.2 C22.Un1 C22.Un2 C23.Un1 C23.Un2 C24.1 C24.2 C24.Un1 C24.Un2 C26.1 C26.2 C26.Un1 C26.Un2 C27.1 C27.2 C27.Un1 C27.Un2 C28.1 C28.2 C28.Un1 C28.Un2 C29.1 C29.2 C29.Un1 C29.Un2 C30.1 C30.2 C30.Un1 C30.Un2 C31.1 C31.2 C31.Un1 C31.Un2 C32.1 C32.2 C32.Un1 C32.Un2 C33.1 C33.2 C33.Un1 C33.Un2 C34.2 C34.Un1 C34.Un2 C35.1 C35.2 C35.Un1 C35.Un2 C36.1 C36.2 C36.Un1 C36.Un2 C37.1 C37.2 C37.Un1 C37.Un2 C38.1 C38.2 C38.Un1 C38.Un2 C39.1 C39.2 C39.Un1 C39.Un2 J1.A8 J1.A9 J1.A12 J1.B1 J1.B4 J1.B8 J1.B9 J1.B12 J1.Un1 J1.Un2 J3.1 J4.2 J6.1 J6.2 J6.3 J6.4 J6.5 J6.6 J6.7 J6.8 J?1.1 J?1.2 J?1.3 J?1.4 J?1.5 J?1.6 J?1.7 J?1.8 J?1.9 J?1.10 J?1.11 J?1.12 J?1.13 J?1.14 J?1.15 J?1.16 J?1.17 J?1.18 J?1.19 J?1.20 R1.Un1 R1.Un2 R2.Un1 R2.Un2 R3.Un1 R3.Un2 R4.Un1 R4.Un2 R5.Un1 R5.Un2 R6.Un1 R6.Un2 R7.Un1 R7.Un2 R8.Un1 R8.Un2 R9.Un1 R9.Un2 R10.Un1 R10.Un2 R11.2 R11.Un1 R11.Un2 U5.9 U355.26 U355.Un1 U355.Un2 U355.Un3 U355.Un4 U778.1 U778.2 U778.3 U778.4 U778.5 U778.6 U778.7 U778.8 U778.9 U778.10 U778.11 U778.12 U778.13 U778.14 U778.15 U778.16 U778.17 U778.18 U778.19 U778.20 u888.1 u888.2 u888.3 u888.4 u888.5 u888.6 u888.7 u888.8 U1854.4
copper on no net: | length 1.9
  F.Cu w0.125: 1.1,-0.175 1.417,-0.175 1.563,-0.321 1.631,-0.389 1.631,-0.665 1.95,-0.984 1.95,-1.475 1.962,-1.487 1.962,-1.575

## Polygon pours and split planes (outlines as drawn)
P3V3 on F.Cu "F.Cu-+3V3" (solid, remove dead copper, pour order 3): 23.206,22.119 23.226,17.069 20.976,17.069 20.976,20.069 21.376,20.069 21.381,21.328 22.081,21.338 22.291,21.808 22.576,22.119 22.556,22.119
no net on F.Cu "F.Cu-GND" (solid, remove dead copper, pour order 2): 25.626,22.469 23.326,22.469 23.326,17.069 24.926,17.069 24.926,17.919 26.376,19.419 26.376,20.869 25.626,21.719

## Keep-outs
Edge.Cuts:
  lines w0: 40.2,-8.33 cw(c39.7,-8.33) 39.7,-8.83 -1.5,-8.83 cw(c-1.5,-8.33) -2,-8.33 -2,8.47 cw(c-1.5,8.47) -1.5,8.97 38.468,8.969 cw(c38.468,8.469) 38.821,8.822 40.049,7.595 cw(c39.695,7.242) 40.195,7.242 40.2,-8.33
  lines w0.254: 40.2,-8.33 cw(c39.7,-8.33) 39.7,-8.83 -1.5,-8.83 cw(c-1.5,-8.33) -2,-8.33 -2,8.47 cw(c-1.5,8.47) -1.5,8.97 38.468,8.969 cw(c38.468,8.469) 38.821,8.822 40.049,7.595 cw(c39.695,7.242) 40.195,7.242 40.2,-8.33

## Silkscreen, mask and mechanical layers (free items; w line width, h text height)
F.SilkS:
  circle w0.254: c40.265,-0.001 r2.052
  region: 40.667,2.022 41.054,1.904 41.411,1.714 41.723,1.457 41.98,1.145 42.17,0.788 42.288,0.401 42.318,0.099 42.327,-0.001 42.288,-0.404 42.17,-0.79 41.98,-1.147 41.723,-1.46 41.411,-1.716 41.054,-1.907 40.667,-2.024 40.365,-2.054 40.265,-2.064 39.863,-2.024 39.476,-1.907 39.119,-1.716 38.807,-1.46 38.55,-1.147 38.36,-0.79 38.242,-0.404 38.212,-0.101 38.203,-0.001 38.242,0.401 38.36,0.788 38.55,1.145 38.807,1.457 39.119,1.714 39.476,1.904 39.863,2.022 40.165,2.051 40.265,2.061
  region: 41.045,5.859 36.655,5.859 36.655,9.799 41.045,9.799
  lines w0.15: 29.118,-11.14 29.118,9.942 ; 12.955,-14.126 14.955,-14.126 14.955,-10.126 12.955,-10.126 12.955,-14.126
  lines w0.254: 36.655,5.859 41.045,5.859 41.045,9.799 36.655,9.799 36.655,5.859
  text "SWD" at -2.971,16.654 h0.4
  text "USB" at -0.971,16.654 h0.4
  text "CLK" at -1.921,14.914 h0.4
  text "3V3" at -3.881,14.904 h0.4
  text "GND" at 0.059,14.894 h0.4
  text "RESET" at 26.07,10.577 h0.8
  text "LINK" at 30.605,4.599 h0.8
  text "." at 16.282,2.809 h3 r270
  text "v1.7" at 24.065,-4.291 h0.7
  text "PWR" at 29.345,-4.341 h0.8
  text "READ" at 30.255,-6.901 h0.8
B.SilkS:
  lines w0.05: 0,-7.62 0,7.62
Top Assembly:
  lines w0.05: -2.875,-6.1 -2.875,6.075 9.5,6.075 29.125,6.075 29.125,-6.1 -2.875,-6.1

## Text inside footprints (layer, text, board x,y; h text height)
J6: Top Assembly "1" at -0.173,-1.326 h0.7 r90
J?1: Top Assembly "1" at 20.047,-1.076 h0.7 r90